# EAGLE board example (EAGLE 7.6.0)

Size 100 x 80 mm. Coordinates in mm from the lower left corner, seen from the top.
Outline: 0,0 100,0 100,80 0,80 0,0
Copper layers (1*16): Top 0.035mm / dielectric 1.5mm / Bottom 0.035mm
Design rules "default": minimum track width 10mil, minimum drill 24mil, track to track 8mil, track to pad 8mil, pad to pad 8mil, via to via 8mil, smd to smd 8mil, copper to edge 40mil, drill to drill 8mil, minimum pad ring 10mil, minimum via ring 8mil, stop-mask expansion 4mil, vias tented up to drill 0mil, thermal gap 10mil

## Footprints (pad centres in the part's own frame; a part is rotated, then mirrored left to right if it is on the bottom)
0603-CAP = smd 1.1 x 1: 1 -0.85,0; 2 0.85,0
1X02_LONGPADS = drill 1.016 pad 1.88 long: 1 0,0; 2 2.54,0
1X03 = drill 1.016 pad 1.88: 1 0,0; 2 2.54,0; 3 5.08,0
CHIP-LED0603 = smd 0.8 x 0.8: A 0,-0.75; C 0,0.75
0603-RES = smd 1.1 x 1: 1 -0.85,0; 2 0.85,0
RFDUINO = smd 3.353 x 0.813: 3V 6.858,-1.27; ANT 6.858,-3.81; FACTORY 6.858,1.27; GND 6.858,5.08; GND0 6.858,-6.35; GND1 6.858,-5.08; GND2 6.858,-2.54; GND4 6.858,6.35; GND5 -6.858,-2.54; GND6 -6.858,5.08; GND7 -6.858,6.35; GPIO0 6.858,2.54; GPIO1 6.858,3.81; GPIO2 -6.858,3.81; GPIO3 -6.858,2.54; GPIO4 -6.858,1.27; GPIO5 -6.858,0; GPIO6 -6.858,-1.27; RESET 6.858,0

## Placement (x,y rotation side)
C1  10uF  [0603-CAP]  29.21,66.04 0 top
C2  10uF  [0603-CAP]  44.45,45.72 0 top
C3  10uF  [0603-CAP]  12.7,73.66 0 top
C4  10uF  [0603-CAP]  12.7,67.31 0 top
JP1  [1X02_LONGPADS]  19.05,17.78 0 top
JP2  [1X03]  72.39,3.81 0 top
LED1  [CHIP-LED0603]  48.26,55.88 0 top
MYRESISTOR  220  [0603-RES]  48.26,66.04 0 top
MYRESISTOR1  10k  [0603-RES]  19.05,48.26 90 top
U$2  RFDUINO  [RFDUINO]  66.04,46.99 180 top

## Library data of the parts
C1-C4 JP1 JP2 MYRESISTOR MYRESISTOR1 = SparkFun
LED1 = adafruit
U$2 = myLibrary_yay

## Nets
GND: C1.2 C2.2 C3.2 C4.2 JP1.2 JP2.1 LED1.C U$2.GND U$2.GND0 U$2.GND1 U$2.GND2 U$2.GND4 U$2.GND5 U$2.GND6 U$2.GND7
LED_CONTROL: MYRESISTOR.1 U$2.GPIO6
N$1: LED1.A MYRESISTOR.2
RESET: MYRESISTOR1.1 U$2.RESET
RX: JP2.3 U$2.GPIO1
TX: JP2.2 U$2.GPIO0
VCC: C1.1 C2.1 C3.1 C4.1 JP1.1 MYRESISTOR1.2 U$2.3V

## Tracks (layer width: path | path; a pad name or v marks a point on that pad's centre or on a via)
GND  (14 unrouted)
LED_CONTROL  (1 unrouted)
N$1  (1 unrouted)
RESET  (1 unrouted)
RX  (1 unrouted)
TX  (1 unrouted)
VCC  (6 unrouted)